# Altium PCB Pico SCSI v1_PCB_Altium.pcbdoc
Units mm, origin at the board's own origin, x right, y up, seen from the top; angles counter-clockwise.
Board outline 98.16 x 57.61 mm, 2 copper layers (Top Layer, Bottom Layer); 10 components, 31 nets, 157 pads, 23 vias.
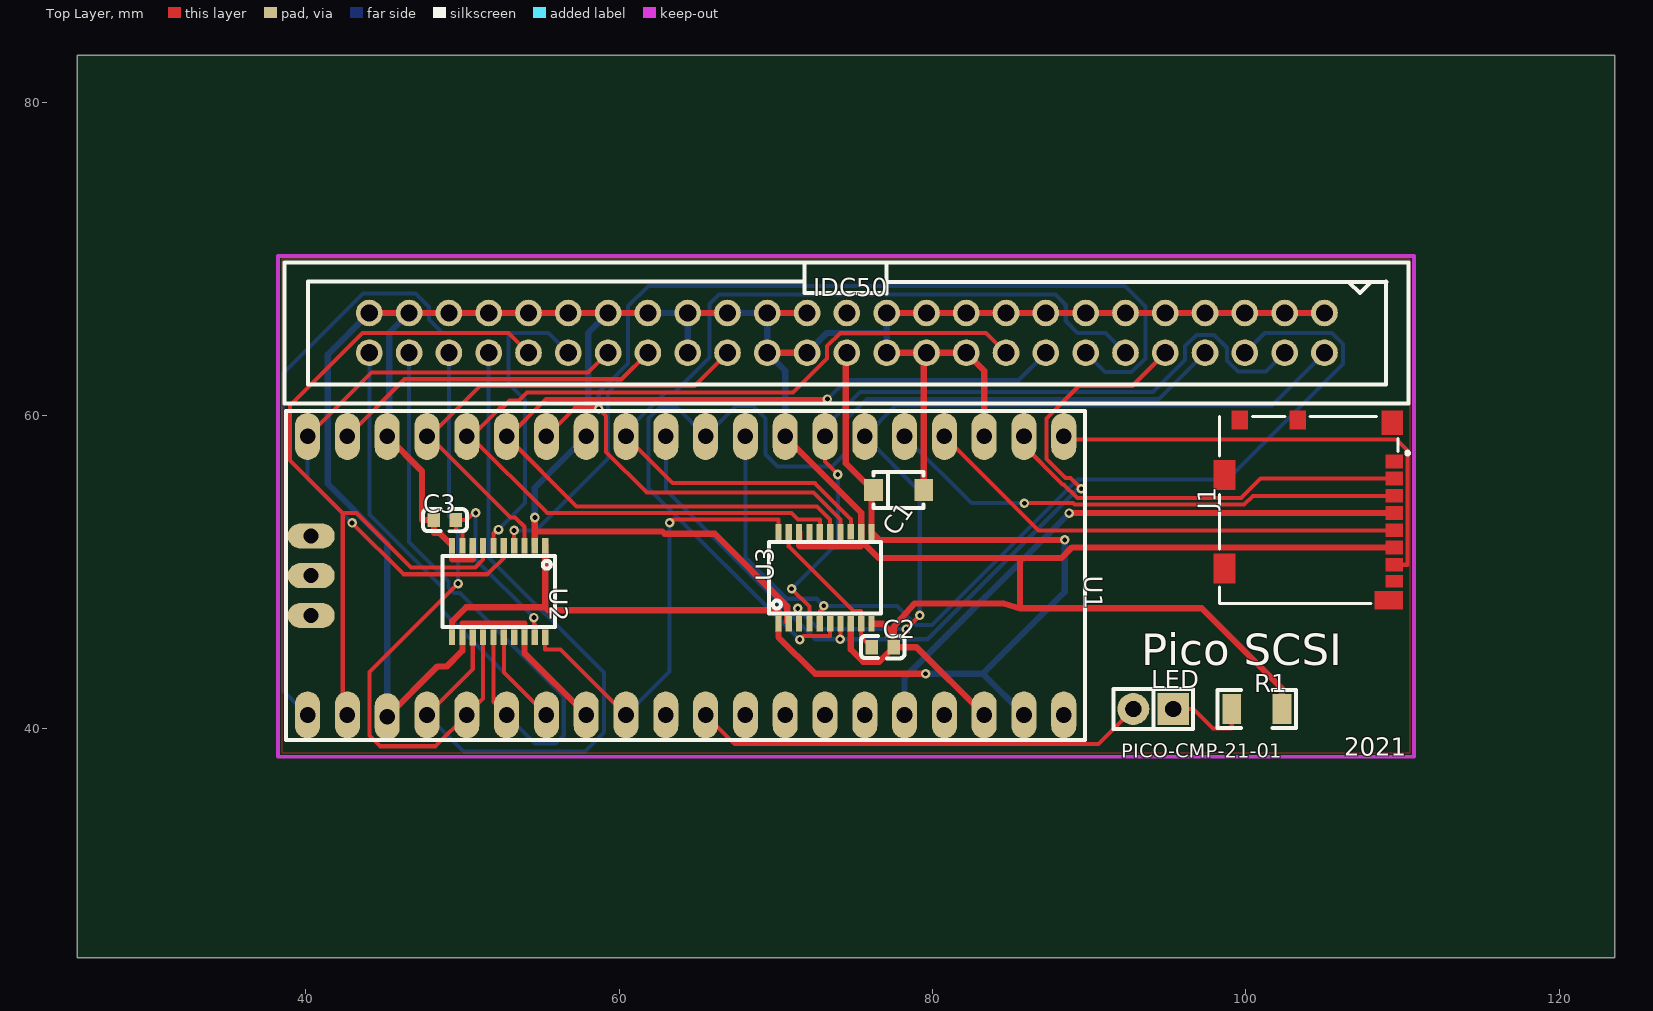
[diagram p0: Top Layer view]
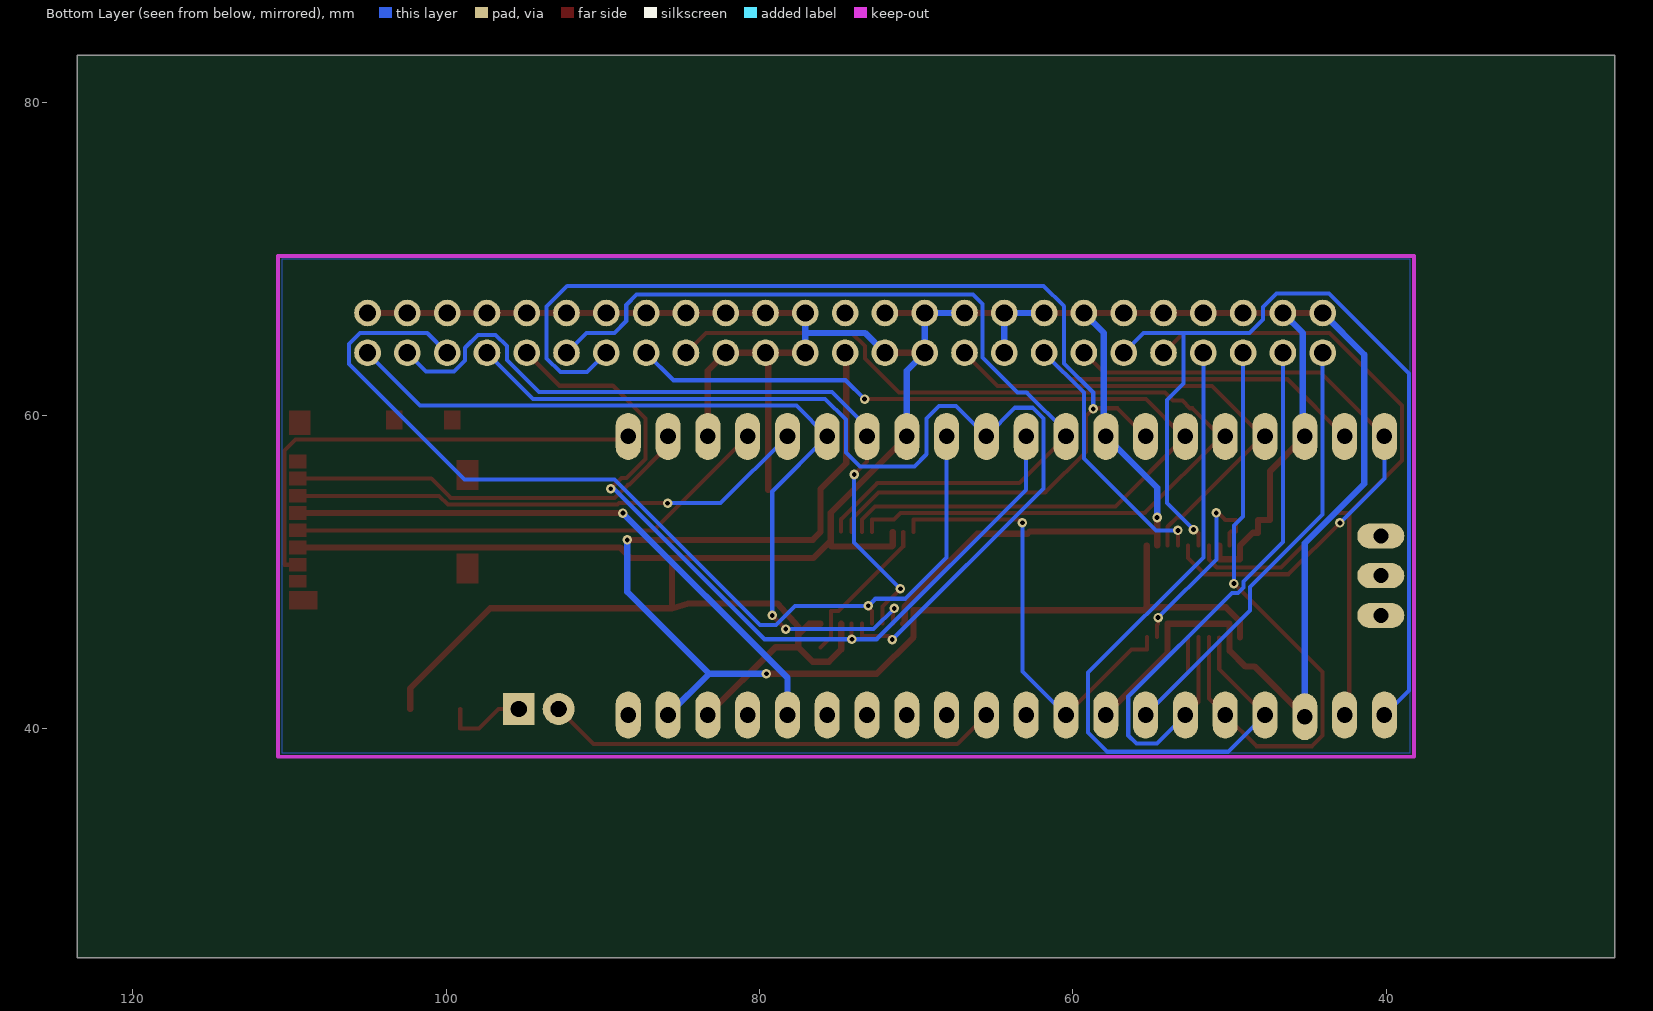
[diagram p1: Bottom Layer view, seen from below]

## Layer stack, top to bottom
Top Layer: signal copper (thickness not stored)
Dielectric: dielectric 0.32, FR-4, Dk 4.8
Bottom Layer: signal copper (thickness not stored)

## Board outline
123.556,25.4 25.4,25.4 25.4,83.012 123.556,83.012

## Components (designator, comment, footprint, x,y, rotation, side; value= is the part's Value field where it differs from the comment)
C1 "2.2uF" CAP-SMD_L3.2-W1.6 77.836,55.245 r0 top
C2 "4.7uF" C0603 76.82,45.212 r0 top
C3 "4.7uF" C0603 48.88,53.34 r180 top
IDC50 "IDC Box2X25 2.54MM" IDC-TH_50P-P2.54_BOOMELE2X25P 74.534,65.278 r180 top
J1 "104031-0811" 1040310811 109.713,53.975 r90 top
LED "Jumper" SIP2 95.362,41.275 r180 top
R1 "68" R1206 100.696,41.275 r0 top
U1 "RASPBERRY Pi Pico TH" "RASPBERRY PI PICO" 64.247,49.784 r270 top
U2 "DS21S07AE" TSSOP20 52.309,48.768 r270 top
U3 "DS21S07AE" TSSOP20 73.137,49.657 r90 top

## Footprints (in the part's own frame and the unit in brackets; to place one, negate y for a bottom-side part, rotate by r counter-clockwise, add the part's x,y. Pads: shape width x height; smd on the part's side, far side on the other; paste and mask are expansions set on the pad)
1040310811 [mm]
  round 0 smd: 1(3.105,0.25) 2(2.005,0.25) 3(0.905,0.25) 4(-0.195,0.25) 5(-1.295,0.25) 6(-2.395,0.25) 7(-3.495,0.25) 8(-4.545,0.25) 9(-5.755,0.6) 10(-3.73,11.075) 11(2.24,11.075) 12(5.74,10.1) 13(5.74,6.4) 14(5.565,0.375)
  Top Layer region: 2.68,0.8 3.53,0.8 3.53,-0.3 2.68,-0.3
  Top Layer region: 1.58,0.8 2.43,0.8 2.43,-0.3 1.58,-0.3
  Top Layer region: 0.48,0.8 1.33,0.8 1.33,-0.3 0.48,-0.3
  Top Layer region: -0.62,0.8 0.23,0.8 0.23,-0.3 -0.62,-0.3
  Top Layer region: -1.72,0.8 -0.87,0.8 -0.87,-0.3 -1.72,-0.3
  Top Layer region: -2.82,0.8 -1.97,0.8 -1.97,-0.3 -2.82,-0.3
  Top Layer region: -3.92,0.8 -3.07,0.8 -3.07,-0.3 -3.92,-0.3
  Top Layer region: -4.92,0.8 -4.17,0.8 -4.17,-0.3 -4.92,-0.3
  Top Layer region: -6.34,1.5 -5.17,1.5 -5.17,-0.3 -6.34,-0.3
  Top Layer region: -4.68,10.4 -4.68,11.75 -2.78,11.75 -2.78,10.4
  Top Layer region: 1.29,10.4 1.29,11.75 3.19,11.75 3.19,10.4
  Top Layer region: 5.14,9.6 5.14,10.6 6.34,10.6 6.34,9.6
  Top Layer region: 5.14,5.9 5.14,6.9 6.34,6.9 6.34,5.9
  Top Layer region: 4.79,-0.3 4.79,1.05 6.34,1.05 6.34,-0.3
  silkscreen extent -5.98,-0.72 5.98,11.4
C0603 [mm]
  rect 0.8x0.9 smd: 1(-0.7,0) 2(0.7,0)
  silkscreen extent -1.4,-0.7 1.4,0.72
CAP-SMD_L3.2-W1.6 [mm]
  rect 1.2x1.4 smd: 1(-1.6,0) 2(1.6,0)
  silkscreen extent -1.6,-1.14 1.6,1.14
IDC-TH_50P-P2.54_BOOMELE2X25P [mm]
  round 1.7 hole 1.1: 1(-30.48,-1.27) 2(-30.48,1.27) 3(-27.94,-1.27) 4(-27.94,1.27) 5(-25.4,-1.27) 6(-25.4,1.27) 7(-22.86,-1.27) 8(-22.86,1.27) 9(-20.32,-1.27) 10(-20.32,1.27) 11(-17.78,-1.27) 12(-17.78,1.27) 13(-15.24,-1.27) 14(-15.24,1.27) 15(-12.7,-1.27) 16(-12.7,1.27) 17(-10.16,-1.27) 18(-10.16,1.27) 19(-7.62,-1.27) 20(-7.62,1.27) 21(-5.08,-1.27) 22(-5.08,1.27) 23(-2.54,-1.27) 24(-2.54,1.27) 25(0,-1.27) 26(0,1.27) 27(2.54,-1.27) 28(2.54,1.27) 29(5.08,-1.27) 30(5.08,1.27) 31(7.62,-1.27) 32(7.62,1.27) 33(10.16,-1.27) 34(10.16,1.27) 35(12.7,-1.27) 36(12.7,1.27) 37(15.24,-1.27) 38(15.24,1.27) 39(17.78,-1.27) 40(17.78,1.27) 41(20.32,-1.27) 42(20.32,1.27) 43(22.86,-1.27) 44(22.86,1.27) 45(25.4,-1.27) 46(25.4,1.27) 47(27.94,-1.27) 48(27.94,1.27) 49(30.48,-1.27) 50(30.48,1.27)
  silkscreen extent -35.84,-4.5 35.89,4.52
R1206 [mm]
  rect 1.2x1.9 smd: 1(-1.6,0) 2(1.6,0)
  silkscreen extent -2.5,-1.2 2.5,1.2
"RASPBERRY PI PICO" [mm]
  oval 3x1.6 hole 1: 1(-8.89,24.13) 2(-8.89,21.59) 3(-8.89,19.05) 4(-8.89,16.51) 5(-8.89,13.97) 6(-8.89,11.43) 7(-8.89,8.89) 8(-8.89,6.35) 9(-8.89,3.81) 10(-8.89,1.27) 11(-8.89,-1.27) 12(-8.89,-3.81) 13(-8.89,-6.35) 14(-8.89,-8.89) 15(-8.89,-11.43) 16(-8.89,-13.97) 17(-8.89,-16.51) 18(-8.89,-19.05) 19(-8.89,-21.59) 20(-8.89,-24.13) 21(8.89,-24.13) 22(8.89,-21.59) 23(9,-19.05) 24(8.89,-16.51) 25(8.89,-13.97) 26(8.89,-11.43) 27(8.89,-8.89) 28(8.89,-6.35) 29(8.89,-3.81) 30(8.89,-1.27) 31(8.89,1.27) 32(8.89,3.81) 33(8.89,6.35) 34(8.89,8.89) 35(8.89,11.43) 36(8.89,13.97) 37(8.89,16.51) 38(8.89,19.05) 39(8.89,21.59) 40(8.89,24.13)
  oval 1.6x3 hole 0.96: 41(-2.54,-23.9) 43(2.54,-23.9)
  oval 1.6x2.999 hole 0.96: 42(0,-23.9)
  silkscreen extent -10.5,-25.5 10.5,25.5
SIP2 [mil]
  rect 80x80 hole 40 slot 40.2 at 0 deg: 1(0,0)
  round 80 hole 40 slot 40.2 at 0 deg: 2(100,0)
  silkscreen extent -50,-50 150,50
TSSOP20 [mil]
  rect 39.4x15.7 smd: 1(-115.5,117) 2(-115.5,91) 3(-115.5,65) 4(-115.5,39) 5(-115.5,13) 6(-115.5,-13) 7(-115.5,-39) 8(-115.5,-65) 9(-115.5,-91) 10(-115.5,-117) 11(114.5,-117) 12(114.5,-91) 13(115.5,-65) 14(114.5,-39) 15(114.5,-13) 16(114.5,13) 17(114.5,39) 18(114.5,65) 19(114.5,91) 20(114.5,117)
  silkscreen extent -90,-141 90,141

## Via types
v1: diameter 0.61, hole 0.31, Top Layer to Bottom Layer, 23 vias

## Nets (pads, with @x,y where several pads share a name; then routed paths per layer and width w, separated by ;. In a path a pad name is that pad's centre, name@x,y a point inside that pad or via, vN(x,y) a via of type N, cw(c..) or ccw(c..) an arc to the next point about the centre after c; other vN are vias at no path point)
+5V: C1.1 IDC50.26 U1.39 U2.1 U2.11 U3.1 U3.11 | length 81.1
  Top Layer w0.4: U2.11 49.337,46.878 50.231,47.772 55.281,47.772 ; U2.1 55.281,50.841 55.281,47.772 ; IDC50.26 74.463,63.937 74.463,56.952 76.109,55.306 U3.11 76.606,52.067 v1(88.44,52.067) ; v1(79.563,43.52) 72.507,43.52 70.165,45.862 U3.1 70.165,47.153 70.165,47.584 55.469,47.584 55.281,47.772
  Bottom Layer w0.4: v1(79.563,43.52) 83.21,43.52 ; U1.39 83.21,43.52 ; v1(88.44,52.067) 88.44,48.748 83.21,43.52
ACK: IDC50.38 U1.20 U2.5 | length 40.3
  Top Layer w0.26: U1.20 44.183,62.741 58.026,62.741 IDC50.38 ; v1(42.956,53.155) 46.236,49.875 51.608,49.875 52.639,50.909 U2.5
  Bottom Layer w0.26: U1.20 40.117,55.994 v1(42.956,53.155)
ACT_LED: LED.2 U1.31 | length 29
  Top Layer w0.26: U1.31 67.376,39.035 90.581,39.035 LED.2
ATN: IDC50.32 U1.17 U2.3 | length 31
  Top Layer w0.26: U1.17 U1.17@47.897,58.674 ; U2.3 53.96,52.494 53.96,52.906 53.36,53.505 53.066,53.505 U1.17@47.897,58.674 ; IDC50.32 64.8,61.895 51.117,61.895 U1.17@47.897,58.674
BSY: IDC50.36 U1.19 U2.4 | length 38.1
  Top Layer w0.26: U1.19 46.302,62.319 60.145,62.319 IDC50.36 ; U2.4 v1(53.299,52.672)
  Bottom Layer w0.26: v1(53.299,52.672) 54.704,52.672 59.294,57.262 59.294,61.468 IDC50.36
C8_1: C3.1 U2.9 U2.19 | length 12.9
  Top Layer w0.26: U2.9 49.997,52.098 49.997,52.494 49.893,52.598 49.581,52.598 C3.1 50.272,53.34 50.719,53.787 v1(50.843,53.787) ; v1(54.562,47.104) 54.562,46.711 54.62,46.652 U2.19
  Bottom Layer w0.26: v1(50.843,53.787) 50.843,50.823 v1(54.562,47.104)
C/D: IDC50.46 U1.25 U2.14 | length 39.7
  Top Layer w0.26: v1(49.718,49.279) 44.066,43.627 44.066,39.571 44.74,38.898 48.28,38.898 U1.25 51.318,41.935 U2.14
  Bottom Layer w0.26: IDC50.46 49.134,53.571 49.718,52.987 v1(49.718,49.279)
DB0: IDC50.2 U1.6 U3.3 | length 54.1
  Top Layer w0.26: v1(71.397,47.699) 71.486,47.61 U3.3 ; v1(78.326,46.375) 79.184,47.234 v1(79.184,47.244)
  Bottom Layer w0.26: v1(71.397,47.699) 72.72,46.375 v1(78.326,46.375) ; v1(79.184,47.244) 79.184,55.166 U1.6 77.65,60.648 101.653,60.648 IDC50.2
DB1: IDC50.4 U1.7 U3.4 | length 48.8
  Top Layer w0.26: v1(71.003,48.946) 72.146,47.803 U3.4 ; U1.7 73.137,57.059 v1(73.955,56.241)
  Bottom Layer w0.26: v1(71.003,48.946) 73.955,51.897 v1(73.955,56.241) ; U1.7 73.137,59.271 75.359,61.493 94.074,61.493 96.124,63.543 96.124,64.43 96.845,65.151 97.97,65.151 98.791,64.331 98.791,63.515 99.489,62.817 101.282,62.817 IDC50.4
DB2: IDC50.6 U1.9 U3.5 | length 64.1
  Top Layer w0.26: U3.5 72.807,47.516 73.058,47.767 v1(73.058,47.861)
  Bottom Layer w0.26: U1.9 68.057,50.95 70.698,48.308 72.611,48.308 v1(73.058,47.861) 77.721,47.861 78.938,46.645 79.962,46.645 89.245,55.931 98.824,55.931 106.197,63.304 106.197,64.572 105.491,65.278 101.204,65.278 IDC50.6
DB3: IDC50.8 U1.10 U3.6 | length 65.5
  Top Layer w0.26: v1(71.526,45.707) 71.75,45.931 73.467,45.931 U3.6
  Bottom Layer w0.26: v1(71.526,45.707) 61.882,55.352 61.882,59.825 62.563,60.503 63.688,60.503 U1.10 67.447,60.604 68.544,60.604 69.327,59.822 69.327,57.534 70.114,56.746 73.574,56.746 74.483,57.655 74.483,59.741 75.814,61.072 94.458,61.072 IDC50.8
DB4: IDC50.10 U1.11 U3.7 | length 53.8
  Top Layer w0.26: v1(74.099,45.725) 74.127,45.753 U3.7 ; v1(89.494,55.331) 88.798,56.03 88.481,56.03 87.285,57.226 87.285,59.827 89.362,61.905 92.751,61.905 IDC50.10
  Bottom Layer w0.26: U1.11 62.977,55.265 72.517,45.725 v1(74.099,45.725) 79.675,45.725 89.281,55.331 v1(89.494,55.331)
DB5: IDC50.12 U1.12 U3.13 | length 57.3
  Top Layer w0.26: U1.12 63.419,55.692 72.481,55.692 74.788,53.383 U3.13
  Bottom Layer w0.26: U1.12 60.437,58.976 62.944,61.483 63.541,61.483 65.771,63.713 65.771,67.125 66.37,67.724 87.851,67.724 88.504,67.071 88.504,66.04 89.266,65.278 91.044,65.278 IDC50.12
DB6: IDC50.14 U1.14 U3.14 | length 74
  Top Layer w0.26: U1.14 57.15,60.467 58.659,60.467 v1(58.697,60.429) 59.167,59.959 59.167,57.688 61.763,55.093 72.393,55.093 74.127,53.358 U3.14
  Bottom Layer w0.26: v1(58.697,60.429) 58.697,61.468 60.564,63.337 60.564,66.98 61.864,68.28 92.271,68.28 93.584,66.967 93.584,63.652 92.707,62.776 91.006,62.776 IDC50.14
DB7: IDC50.16 U1.15 U3.15 | length 60.2
  Top Layer w0.26: U1.15 U1.15@52.89,58.6 ; v1(73.289,61.049) 55.339,61.049 U1.15@52.89,58.6 ; U3.15 73.467,53.358 72.621,54.204 57.287,54.204 U1.15@52.89,58.6
  Bottom Layer w0.26: v1(73.289,61.049) 74.498,62.255 85.484,62.255 IDC50.16
DBP: IDC50.18 U1.16 U3.16 | length 63.4
  Top Layer w0.26: U1.16 50.302,58.649 U1.16@50.546,58.649 ; U3.16 72.807,53.358 71.425,53.358 71.001,53.782 55.413,53.782 U1.16@50.546,58.649 ; IDC50.18 83.424,65.278 74.112,65.278 73.264,64.43 73.264,63.647 71.09,61.473 54.12,61.473 53.607,60.957 53.007,60.957 52.517,60.467 52.365,60.467 U1.16@50.546,58.649
GND: C1.2 C2.2 C3.2 IDC50.1 IDC50.3 IDC50.5 IDC50.7 IDC50.9 IDC50.11 IDC50.13 IDC50.15 IDC50.17 IDC50.19 IDC50.20 IDC50.21 IDC50.22 IDC50.23 IDC50.24 IDC50.27 IDC50.28 IDC50.29 IDC50.30 IDC50.31 IDC50.33 IDC50.34 IDC50.35 IDC50.37 IDC50.39 IDC50.41 IDC50.43 IDC50.45 IDC50.47 IDC50.49 J1.6 R1.2 U1.3 U1.8 U1.13 U1.18 U1.23 U1.28 U1.38 U2.2 U2.8 U2.10 U2.12 U2.18 U3.2 U3.8 U3.10 U3.12 U3.18 | length 298.5
  Top Layer w0.4: IDC50.49 IDC50.47 IDC50.45 IDC50.43 IDC50.41 IDC50.39 IDC50.37 IDC50.35 ; U1.23 48.4,43.985 48.984,43.985 49.997,44.999 U2.12 49.997,46.721 50,46.721 53.957,46.721 53.96,46.721 U2.18 53.96,44.831 U1.28 ; U1.18 47.419,56.451 47.419,53.34 C3.2 48.179,52.53 48.509,52.53 U2.10 49.337,50.841 49.34,50.838 50.655,50.838 50.658,50.841 U2.8 ; U2.2 54.62,52.598 ; v1(54.62,53.495) 54.62,52.598 ; IDC50.33 IDC50.31 ; IDC50.30 IDC50.28 ; IDC50.29 IDC50.27 ; U1.8 70.597,58.656 75.448,53.805 U3.12 75.448,52.263 75.448,52.014 ; U3.2 70.726,46.822 70.726,47.816 66.093,52.451 62.898,52.451 62.751,52.598 54.62,52.598 ; U3.18 71.486,51.704 71.549,51.643 75.385,51.643 75.448,51.704 75.448,52.014 ; U3.8 74.788,46.431 74.788,46.002 74.788,45.075 75.57,44.295 76.604,44.295 C2.2 ; U3.10 76.82,46.723 77.521,46.022 ; IDC50.24 IDC50.22 ; IDC50.23 IDC50.21 IDC50.19 IDC50.17 IDC50.15 IDC50.13 IDC50.11 IDC50.9 IDC50.7 IDC50.5 IDC50.3 IDC50.1 ; C1.2 79.436,63.83 IDC50.22 ; U1.38 78.979,45.212 C2.2 ; U1.3 83.297,62.865 IDC50.20 IDC50.22 ; 84.567,48.006 84.524,48.006 ; R1.2 102.296,42.586 97.18,47.701 85.583,47.701 ; J1.6 88.895,51.58 88.219,50.907 85.583,50.907 ; 75.448,52.014 76.556,50.907 85.583,50.907 ; C2.2 77.521,46.022 ; 77.521,46.022 77.521,46.52 78.852,48.006 84.524,48.006 ; 84.524,48.006 85.583,47.701 ; 85.583,47.701 85.583,48.661 85.583,50.907
  Bottom Layer w0.4: IDC50.49 41.402,63.896 41.402,55.651 45.197,51.857 U1.23 ; U1.18 45.324,58.801 45.324,65.278 IDC50.47 ; v1(54.62,53.495) 54.62,55.397 U1.13 58.024,58.801 58.024,65.278 IDC50.37 ; IDC50.35 IDC50.33 IDC50.34 ; IDC50.31 IDC50.29 IDC50.30 70.597,62.865 U1.8 ; IDC50.28 73.264,65.278 77.074,65.278 ; IDC50.24 77.074,65.278 ; IDC50.23 77.074,65.278
I/O: IDC50.50 U1.27 U2.16 | length 33.9
  Top Layer w0.26: U2.16 52.639,43.612 U1.27
  Bottom Layer w0.26: IDC50.50 44.054,53.696 48.699,49.052 48.699,47.551 U1.27
JP1_1: LED.1 R1.1 | length 5.5
  Top Layer w0.26: LED.1 96.67,41.275 97.912,40.033 99.096,40.033 R1.1
MSG: IDC50.42 U1.22 U2.7 | length 50.4
  Top Layer w0.26: U1.22 42.357,41.194 42.357,53.779 ; U2.7 51.318,50.803 50.815,50.3 46.706,50.3 43.223,53.779 42.357,53.779 ; IDC50.42 52.944,65.278 43.619,65.278 38.994,60.653 38.994,57.145 42.357,53.779
REQ: IDC50.48 U1.26 U2.15 | length 38.7
  Top Layer w0.26: U2.15 51.979,41.732 U1.26
  Bottom Layer w0.26: IDC50.48 46.594,51.938 49.121,49.411 49.121,49.032 49.472,48.682 49.85,48.682 56.464,42.067 56.464,39.588 55.949,39.073 54.638,39.073 U1.26
RST: IDC50.40 U1.21 U2.6 | length 59.7
  Top Layer w0.26: U2.6 51.979,52.494 52.07,52.494 v1(52.299,52.723)
  Bottom Layer w0.26: U1.21 38.544,42.466 38.544,62.685 43.652,67.79 47.008,67.79 47.864,66.934 47.864,66.142 48.727,65.278 52.944,65.278 ; v1(52.299,52.723) 53.988,54.412 53.988,61.008 52.944,62.052 52.944,65.278 ; IDC50.40 55.484,65.278 52.944,65.278
S$68: 
SD_CLK: J1.5 U1.4 | length 31.2
  Top Layer w0.26: U1.4 86.751,52.68 J1.5
SD_CS: J1.2 U1.2 | length 26.1
  Top Layer w0.26: U1.2 85.837,58.075 88.306,55.606 88.374,55.606 89.245,54.734 99.703,54.734 100.947,55.979 J1.2
SD_MISO: J1.7 U1.1 | length 30.4
  Top Layer w0.26: U1.1 88.577,58.473 109.611,58.473 110.305,57.78 110.305,50.48 J1.7
SD_MOSI: J1.3 U1.5 | length 33.3
  Top Layer w0.26: v1(85.867,54.409) 88.974,54.409 89.07,54.313 99.878,54.313 100.447,54.879 J1.3
  Bottom Layer w0.26: U1.5 82.481,54.409 v1(85.867,54.409)
SEL: IDC50.44 U1.24 U2.13 | length 46.2
  Top Layer w0.26: U1.24 50.658,43.815 U2.13
  Bottom Layer w0.26: U1.24 50.086,38.544 57.803,38.544 59.037,39.776 59.037,43.591 51.674,50.955 IDC50.44
TERM_EN: U1.29 U2.20 U3.20 | length 28.9
  Top Layer w0.26: U2.20 55.281,45.067 56.264,45.067 U1.29 ; v1(63.218,53.16) 63.414,53.358 70.165,53.358 U3.20
  Bottom Layer w0.26: U1.29 63.218,43.675 v1(63.218,53.16)
U3_9: C2.1 U3.9 U3.19 | length 9.8
  Top Layer w0.26: U3.19 70.825,51.638 74.948,47.516 75.448,47.516 U3.9 75.448,45.883 C2.1
VCC: J1.4 U1.36 | length 38
  Top Layer w0.4: v1(88.715,53.779) J1.4
  Bottom Layer w0.4: U1.36 78.217,43.284 v1(88.715,53.779)
pads on no net: IDC50.25 J1.1 J1.8 J1.9 J1.10 J1.11 J1.12 J1.13 J1.14 U1.30 U1.32 U1.33 U1.34 U1.35 U1.37 U1.40 U1.41 U1.42 U1.43 U2.17 U3.17

## Polygon pours and split planes (outlines as drawn)
GND on Top Layer (solid): 38.466,69.977 38.466,38.481 110.475,38.481 110.475,69.977
GND on Bottom Layer (solid): 38.466,69.977 110.475,69.977 110.475,38.481 38.466,38.481

## Silkscreen, mask and mechanical layers (free items; w line width, h text height)
Top Overlay:
  text "Pico SCSI" at 93.33,44.069 h2.03
  text "2021" at 106.284,38.291 h1.14
  text "PICO-CMP-21-01" at 92.06,38.158 h0.9

## Text inside footprints (layer, text, board x,y; h text height)
J1: Document "J" at 102.939,52.788 h1.27 r270
U1: Document "PICO" at 81.392,42.799 h2.03